# EAGLE board EVmulator_T85_Compact (EAGLE 9.6.2)
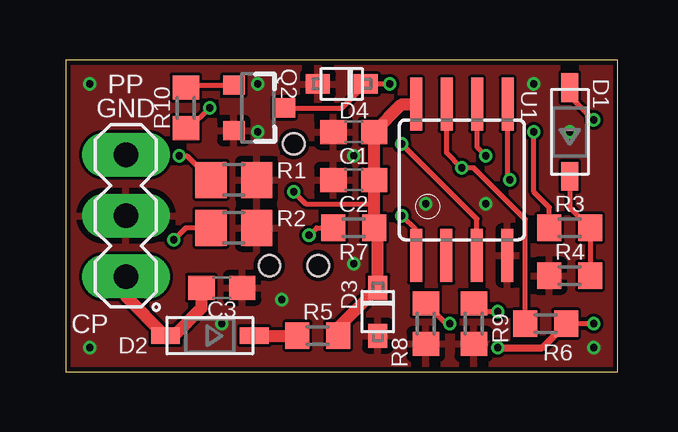
[diagram p0: board, top side]
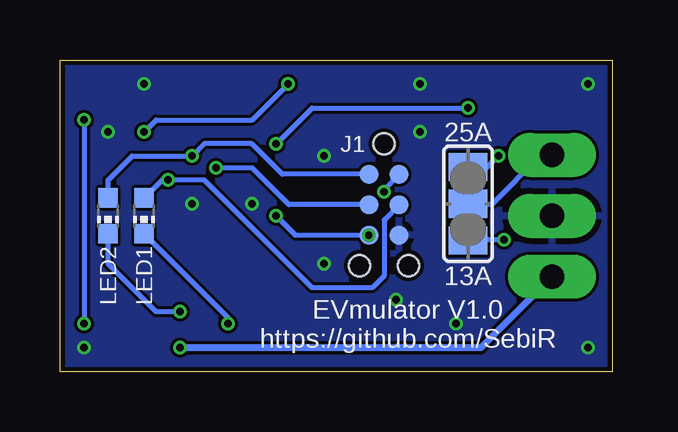
[diagram p1: board, bottom side, seen from below]

Size 23 x 13 mm. Coordinates in mm from the lower left corner, seen from the top.
Outline: 0,0 23,0 23,13 0,13 0,0
Copper layers (1*16): Top 0.035mm / dielectric 1.6mm / Bottom 0.035mm
Design rules "jlcpcb-2layers": minimum track width 0.2mm, minimum drill 0.3mm, track to track 5mil, track to pad 5mil, pad to pad 5mil, via to via 5mil, smd to smd 5mil, copper to edge 0.2mm, drill to drill 6mil, minimum pad ring 10mil, minimum via ring 0.125mm, stop-mask expansion 4mil, vias tented up to drill 0.5mm, thermal gap 10mil

## Footprints (pad centres in the part's own frame; a part is rotated, then mirrored left to right if it is on the bottom)
C0603 = smd 1.1 x 1: 1 -0.85,0; 2 0.85,0
SOD-123 = smd 1.2 x 0.7: A 1.85,0; C -1.85,0
SOD-323F = smd 1 x 0.8: A -1,0; C 1,0
TAG-CONNECT_TC2030-MCP-NL = smd 0.787 x 0.787: 1 1.27,-0.635; 2 1.27,0.635; 3 2.54,-0.635; 4 2.54,0.635; 5 3.81,-0.635; 6 3.81,0.635 | hole 0.889: 0,0; 5.08,-1.016; 5.08,1.016
CHIP-LED0603 = smd 0.8 x 0.8: A 0,-0.75; C 0,0.75
SOT23-3 = smd 0.8 x 0.9: 1 -0.95,-1; 2 0.95,-1; 3 0,1.1
R0805 = smd 1.3 x 1.5: 1 -0.95,0; 2 0.95,0
R0603 = smd 1 x 1.1: 1 -0.85,0; 2 0.85,0
SJ_2 = smd 1.168 x 1.6: 1 -1.524,0; 2 0,0; 3 1.524,0
MA03-1 = drill 1.016 long: 1 -2.54,0; 2 0,0; 3 2.54,0
SOIC8 = smd 0.5 x 2.2: 1 -1.905,-3.154; 2 -0.645,-3.154; 3 0.625,-3.154; 4 1.895,-3.154; 5 1.905,3.154; 6 0.635,3.154; 7 -0.635,3.154; 8 -1.905,3.154

## Placement (x,y rotation side)
C1  4u7  [C0603]  12,10 180 top
C2  100n  [C0603]  12,8 180 top
C3  1n  [C0603]  6.5,3.5 0 top
D1  B5819W-TP  [SOD-123]  21,10 90 top
D2  B5819W-TP  [SOD-123]  6,1.5 180 top
D3  BZX38450-C4V7X  [SOD-323F]  13,2.5 90 top
D4  SD15-01FTG  [SOD-323F]  11.5,12 0 top
J1  [TAG-CONNECT_TC2030-MCP-NL]  9.5,9.5 270 bottom
LED1  [CHIP-LED0603]  19.5,6.5 180 bottom
LED2  [CHIP-LED0603]  21,6.5 180 bottom
Q2  DMN3404L-7  [SOT23-3]  8,11 270 top
R1  1k5  [R0805]  7,8 180 top
R2  220R  [R0805]  7,6 180 top
R3  1k3  [R0603]  21,6 0 top
R4  4k7  [R0603]  21,4 0 top
R5  2k2  [R0603]  10.5,1.5 180 top
R6  100k  [R0603]  20,2 0 top
R7  100k  [R0603]  12,6 180 top
R8  1k  [R0603]  15,2 90 top
R9  1k  [R0603]  17,2 90 top
R10  1k  [R0603]  5,11 270 top
SJ1  [SJ_2]  6,7 90 bottom
SV1  [MA03-1]  2.5,6.5 90 top
U1  ATTINY85V  [SOIC8]  16.5,8 0 top

## Library data of the parts
C1-C3 = rcl; SPICEPREFIX: C
D1-D4 = adafruit
J1 U1 = Eigene-Rietig
LED1 LED2 = led
Q2 = SparkFun-DiscreteSemi; PROD_ID: TRANS-12988
R1-R10 = rcl; SPICEPREFIX: R
SJ1 = jumper
SV1 = con-lstb; OC_FARNELL: unknown; OC_NEWARK: unknown

## Nets
4V7: C1.1 C2.1 D3.C J1.2 R5.1 R7.1 U1.8
CON_CP: C3.1 D1.A D2.A R6.2 SV1.1
CON_PP: SJ1.2 SV1.3
GND: C1.2 C2.2 C3.2 D3.A D4.A J1.6 Q2.2 R1.1 R2.1 R4.1 R8.1 R9.1 SV1.2 U1.4
LED_GN: J1.4 LED1.A U1.5
LED_RD: J1.1 LED2.A U1.6
N$1: R1.2 SJ1.3
N$2: R2.2 SJ1.1
N$3: LED1.C R8.2
N$4: LED2.C R9.2
N$5: D4.C Q2.3 R3.1
N$6: D1.C R3.2 R4.2
N$7: D2.C R5.2
N$8: Q2.1 R10.1
N$10: R10.2 U1.3
PWM_DET: J1.3 R6.1 U1.7
RES: J1.5 R7.2 U1.1

## Tracks (layer width: path | path; a pad name or v marks a point on that pad's centre or on a via)
4V7  (via drill 0.3)
  Top 0.2: v9.5,7.5 10,7 12.85,7
  Top 0.5: U1.8 14,11.15 C1.1 C2.1 12.85,7 R7.1 13,5.85 D3.C 11.35,1.85 R5.1
  Bottom 0.2: J1.2 9.5,7.59 v9.5,7.5
CON_CP  (via drill 0.3)
  Top 0.2: D1.A 21,11.5 v22,10.5 | v22,2 R6.2
  Top 0.3: v18,1 19.85,1 R6.2
  Top 0.5: SV1.1 2.5,3.15 D2.A 4.5,1.5 5.65,2.65 C3.1
  Bottom 0.2: v22,10.5 v22,2
  Bottom 0.3: SV1.1 5.46,1 v18,1
CON_PP
  Bottom 0.2: SJ1.2 5,7 2.96,9.04 SV1.3
GND  (via drill 0.3)
  other vias: 9,3 17.5,7 22,1 19.5,12 21,10 8,12 8,10 1,12 1,1 12,4.5 12,9 6.5,2 15,7
  pour Top: 0,13 23,13 23,0 0,0
  pour Bottom: 0,13 23,13 23,0 0,0
LED_GN  (via drill 0.3)
  Top 0.2: v18.5,8 18.41,8.1 U1.5
  Bottom 0.2: LED1.A 18.75,8 v18.5,8 17,8 12.5,3.5 10,3.5 9.5,4 9.5,6.33 J1.4
LED_RD  (via drill 0.3)
  Top 0.2: v17.5,9 17.14,9.37 U1.6
  Bottom 0.2: J1.1 13.73,8.23 15,9.5 17,9.5 v17.5,9 20,9 21,8 LED2.A
N$1  (via drill 0.3)
  Top 0.2: 5.73,8 R1.2 5.05,9 v4.73,9
  Bottom 0.2: SJ1.3 5.21,8.52 v4.73,9
N$2  (via drill 0.3)
  Top 0.2: R2.2 5,6 v4.5,5.5
  Bottom 0.2: v4.5,5.5 5.98,5.5 SJ1.1
N$3  (via drill 0.3)
  Top 0.2: v16,2 15.85,2 R8.2
  Bottom 0.2: LED1.C 16,2.25 v16,2
N$4  (via drill 0.3)
  Top 0.2: 17.15,2.85 R9.2 17.35,2.5 v18,2.5
  Bottom 0.2: v18,2.5 19,2.5 21,4.5 LED2.C
N$5  (via drill 0.3)
  Top 0.2: Q2.3 11.5,11 D4.C v13.5,12 | R3.1 20.15,6.85 19.5,7.5 v19.5,10
  Bottom 0.2: v19.5,10 19,10.5 15,10.5 v13.5,12
N$6
  Top 0.2: D1.C 21,6.85 R3.2 R4.2
N$7
  Top 0.5: D2.C R5.2
N$8
  Top 0.2: R10.1 5.1,11.95 Q2.1
N$10  (via drill 0.3)
  Top 0.2: U1.3 17.12,6.38 v14,9.5 | v6,11 5.15,10.15 R10.2
  Bottom 0.2: v14,9.5 12.5,11 v6,11
PWM_DET  (via drill 0.3)
  Top 0.2: U1.7 15.87,9.13 v16.5,8.5 17,8.5 19.15,6.35 R6.1
  Bottom 0.2: J1.3 13.46,6.96 15,8.5 v16.5,8.5
RES  (via drill 0.3)
  Top 0.2: J1.5 10.45,6 R7.2 | U1.1 14.6,5.91 v14,6.5
  Bottom 0.2: v14,6.5 13.19,5.69 J1.5
  other vias: 10.13,5.69

## Text on the board
tPlace: PP | GND | CP
bPlace: 25A | 13A | EVmulator V1.0 / https://github.com/SebiR